# EAGLE board driver LF (EAGLE 9.6.2)
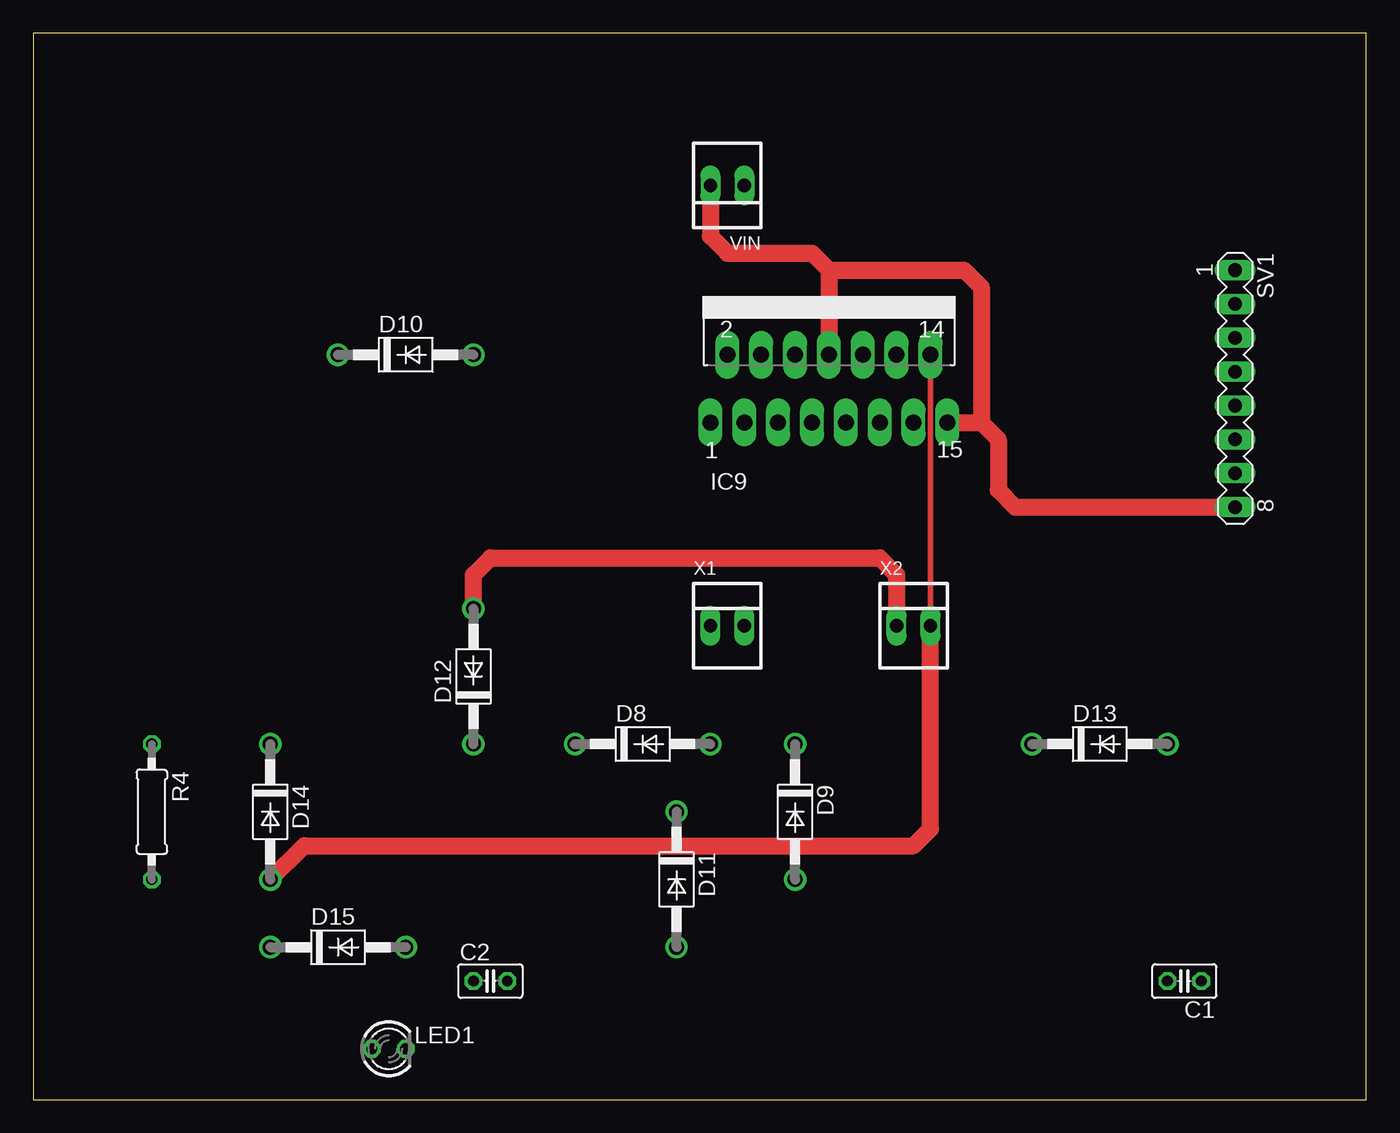
[diagram p0: board, top side]
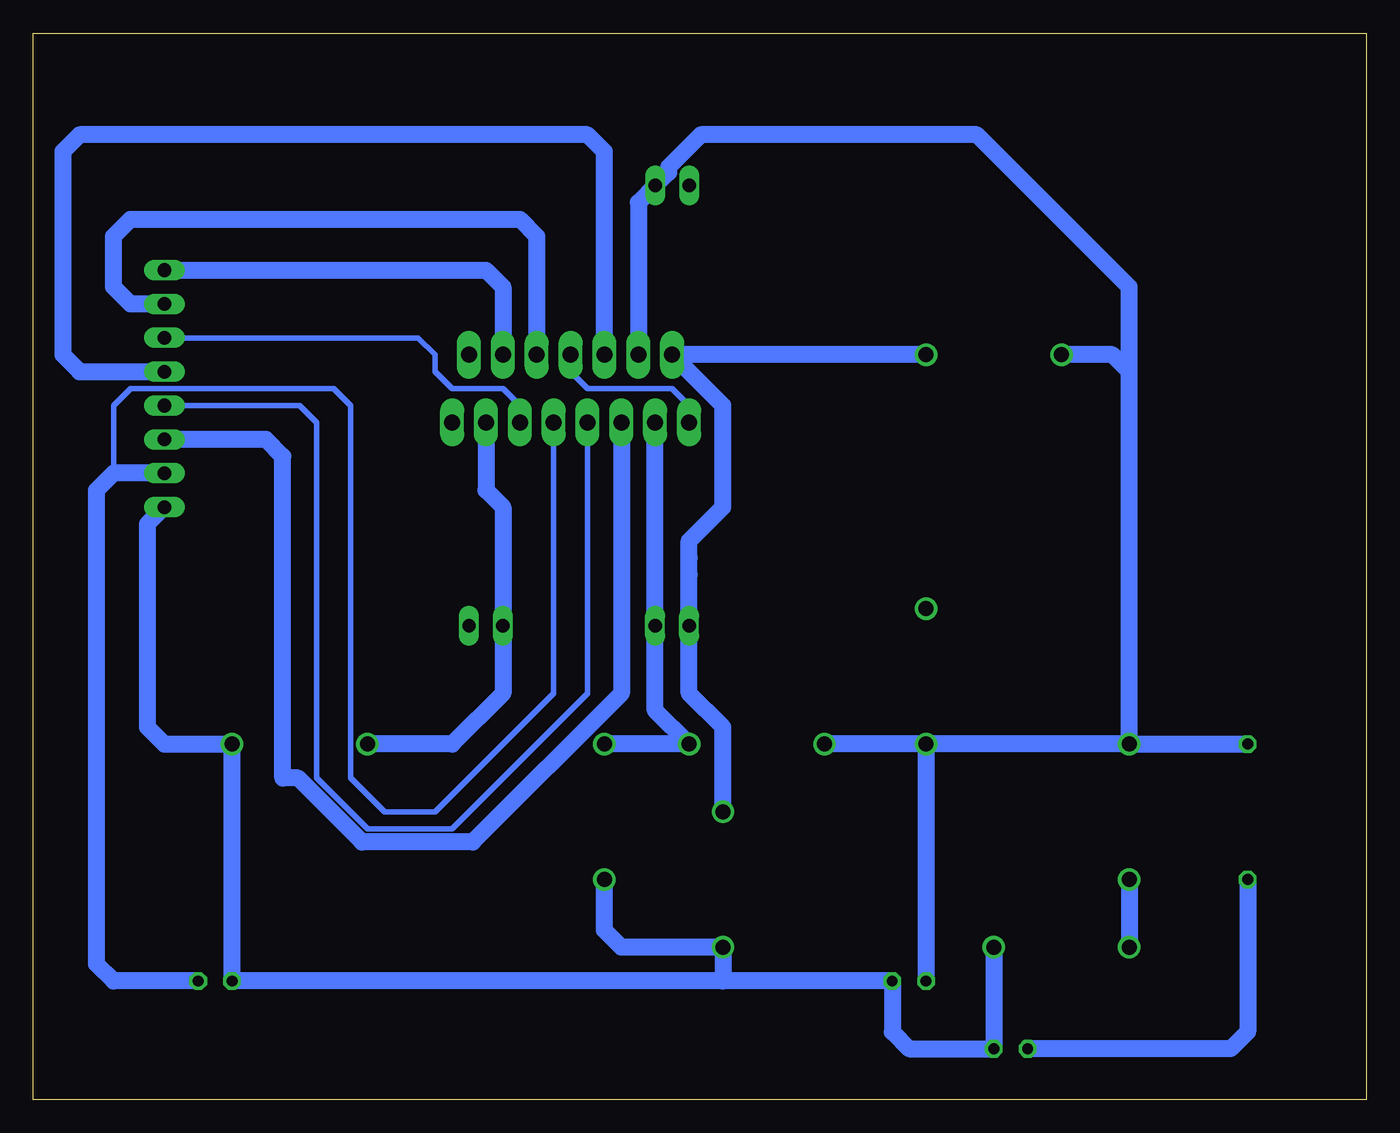
[diagram p1: board, bottom side, seen from below]

Size 100 x 80 mm. Coordinates in mm from the lower left corner, seen from the top.
Outline: 0,0 100,0 100,80 0,80 0,0
Copper layers (1*16): Top 0.035mm / dielectric 1.5mm / Bottom 0.035mm
Design rules "default": minimum track width 6mil, minimum drill 0.35mm, track to track 6mil, track to pad 6mil, pad to pad 6mil, via to via 6mil, smd to smd 6mil, copper to edge 40mil, drill to drill 6mil, minimum pad ring 10mil, minimum via ring 8mil, stop-mask expansion 4mil, vias tented up to drill 0mil, thermal gap 10mil

## Footprints (pad centres in the part's own frame; a part is rotated, then mirrored left to right if it is on the bottom)
C025-025X050 = drill 0.813 octagon: 1 -1.27,0; 2 1.27,0
DO41-10 = drill 1.118: A 5.08,0; C -5.08,0
MULTIWATT-15 = drill 1.2 long: 1 -8.89,-7.62; 2 -7.62,-2.54; 3 -6.35,-7.62; 4 -5.08,-2.54; 5 -3.81,-7.62; 6 -2.54,-2.54; 7 -1.27,-7.62; 8 0,-2.54; 9 1.27,-7.62; 10 2.54,-2.54; 11 3.81,-7.62; 12 5.08,-2.54; 13 6.35,-7.62; 14 7.62,-2.54; 15 8.89,-7.62
LED3MM = drill 0.813 octagon: A -1.27,0; K 1.27,0
0207/10 = drill 0.813 octagon: 1 -5.08,0; 2 5.08,0
MA08-1 = drill 1.016 long: 1 -8.89,0; 2 -6.35,0; 3 -3.81,0; 4 -1.27,0; 5 1.27,0; 6 3.81,0; 7 6.35,0; 8 8.89,0
22-23-2021 = drill 1 long: 1 -1.27,0; 2 1.27,0

## Placement (x,y rotation side)
C1  100nF  [C025-025X050]  86.36,8.89 180 top
C2  100nF  [C025-025X050]  34.29,8.89 0 top
D8  1N4004  [DO41-10]  45.72,26.67 0 top
D9  1N4004  [DO41-10]  57.15,21.59 270 top
D10  1N4004  [DO41-10]  27.94,55.88 0 top
D11  1N4004  [DO41-10]  48.26,16.51 270 top
D12  1N4004  [DO41-10]  33.02,31.75 90 top
D13  1N4004  [DO41-10]  80.01,26.67 0 top
D14  1N4004  [DO41-10]  17.78,21.59 270 top
D15  1N4004  [DO41-10]  22.86,11.43 0 top
IC9  L298  [MULTIWATT-15]  59.69,58.42 0 top
LED1  [LED3MM]  26.67,3.81 0 top
R4  330  [0207/10]  8.89,21.59 270 top
SV1  [MA08-1]  90.17,53.34 270 top
VIN  22-23-2021  [22-23-2021]  52.07,68.58 180 top
X1  22-23-2021  [22-23-2021]  52.07,35.56 0 top
X2  22-23-2021  [22-23-2021]  66.04,35.56 0 top

## Library data of the parts
C1 C2 R4 = rcl
D8-D15 = diode
IC9 = st-microelectronics
LED1 = led
SV1 = con-lstb; OC_FARNELL: unknown; OC_NEWARK: unknown
VIN X1 X2 = con-molex; MF: MOLEX; MPN: 22-23-2021; OC_FARNELL: 1462926; OC_NEWARK: 25C3832

## Nets
GND: C1.2 C2.2 D9.A D11.A D13.A D15.A IC9.1 IC9.8 IC9.15 LED1.K SV1.8 VIN.2
N$1: IC9.5 SV1.6
N$3: IC9.7 SV1.5
N$5: IC9.12 SV1.1
N$8: IC9.10 SV1.2
N$16: IC9.6 SV1.4
N$17: IC9.11 SV1.3
N$44: LED1.A R4.2
N$204: D8.A D9.C IC9.3 X1.2
N$205: D10.A D11.C IC9.2 X1.1
N$206: D12.A D13.C IC9.13 X2.1
N$207: D14.A D15.C IC9.14 X2.2
VCC: C1.1 IC9.9 SV1.7
VDD: C2.1 D8.C D10.C D12.C D14.C IC9.4 R4.1 VIN.1

## Tracks (layer width: path | path; a pad name or v marks a point on that pad's centre or on a via)
GND
  Top 1.27: VIN.2 50.8,64.77 52.07,63.5 58.42,63.5 59.69,62.23 | 59.69,62.23 IC9.8 | 59.69,62.23 69.85,62.23 71.12,60.96 71.12,50.8 | IC9.15 71.12,50.8 | 71.12,50.8 72.39,49.53 72.39,45.72 73.66,44.45 SV1.8
  Bottom 0.406: IC9.8 59.69,54.61 58.42,53.34 52.07,53.34 50.8,52.07 IC9.1
  Bottom 1.27: 48.26,8.89 C2.2 35.56,5.08 34.29,3.81 LED1.K D15.A | 48.26,8.89 C1.2 D13.A 90.17,26.67 91.44,27.94 91.44,43.18 SV1.8 | 48.26,8.89 D11.A 55.88,11.43 57.15,12.7 D9.A
N$1
  Bottom 0.406: SV1.6 83.82,49.53 82.55,49.53
  Bottom 1.27: IC9.5 55.88,30.48 67.03,19.33 75.34,19.33 80.14,24.13 81.28,24.13 81.28,48.26 82.55,49.53 SV1.6
N$3
  Bottom 0.406: SV1.5 80.01,52.07 78.74,50.8 78.74,24.13 74.93,20.32 68.58,20.32 58.42,30.48 IC9.7
N$5
  Bottom 1.27: SV1.1 66.04,62.23 64.77,60.96 IC9.12
N$8
  Bottom 1.27: SV1.2 92.71,59.69 93.98,60.96 93.98,64.77 92.71,66.04 63.5,66.04 62.23,64.77 IC9.10
N$16
  Bottom 1.27: IC9.6 57.15,71.12 58.42,72.39 96.52,72.39 97.79,71.12 97.79,55.88 96.52,54.61 SV1.4
N$17
  Bottom 0.406: IC9.11 63.5,52.07 64.77,53.34 68.58,53.34 69.85,54.61 69.85,55.88 71.12,57.15 SV1.3
N$44
  Bottom 1.27: R4.2 8.89,5.08 10.16,3.81 LED1.A
N$204
  Bottom 1.27: D9.C D8.A 53.34,29.21 X1.2 IC9.3
N$205
  Bottom 1.27: D10.A IC9.2 48.26,52.07 48.26,44.45 50.8,41.91 50.8,40.64 50.8,39.37 X1.1 50.8,30.48 48.26,27.94 D11.C
N$206
  Top 1.27: D12.A 33.02,39.37 34.29,40.64 63.5,40.64 64.77,39.37 X2.1
  Bottom 1.27: IC9.13 66.04,45.72 64.77,44.45 X2.1 64.77,30.48 68.58,26.67 D13.C
N$207
  Top 0.406: IC9.14 X2.2
  Top 1.27: D14.A 20.32,19.05 66.04,19.05 67.31,20.32 X2.2
  Bottom 1.27: D14.A D15.C
VCC
  Bottom 0.406: IC9.9 60.96,30.48 69.85,21.59 73.66,21.59 76.2,24.13 76.2,52.07 77.47,53.34 92.71,53.34 93.98,52.07 93.98,46.99
  Bottom 1.27: C1.1 93.98,8.89 95.25,10.16 95.25,45.72 93.98,46.99 SV1.7
VDD
  Bottom 1.27: IC9.4 54.61,67.31 VIN.1 52.34,69.58 52.34,69.97 49.92,72.39 29.21,72.39 17.78,60.96 17.78,54.61 | D14.C 17.78,45.72 17.78,54.61 | 17.78,54.61 19.05,55.88 D10.C | D14.C R4.1 | D14.C D12.C | D12.C C2.1 | D12.C D8.C